# Altium PCB Teach MC interface.PcbDoc
Units mm, origin at the board's own origin, x right, y up, seen from the top; angles counter-clockwise.
Board outline 65 x 56 mm, 2 copper layers (Top Layer, Bottom Layer); 36 components, 37 nets, 175 pads, 420 vias.
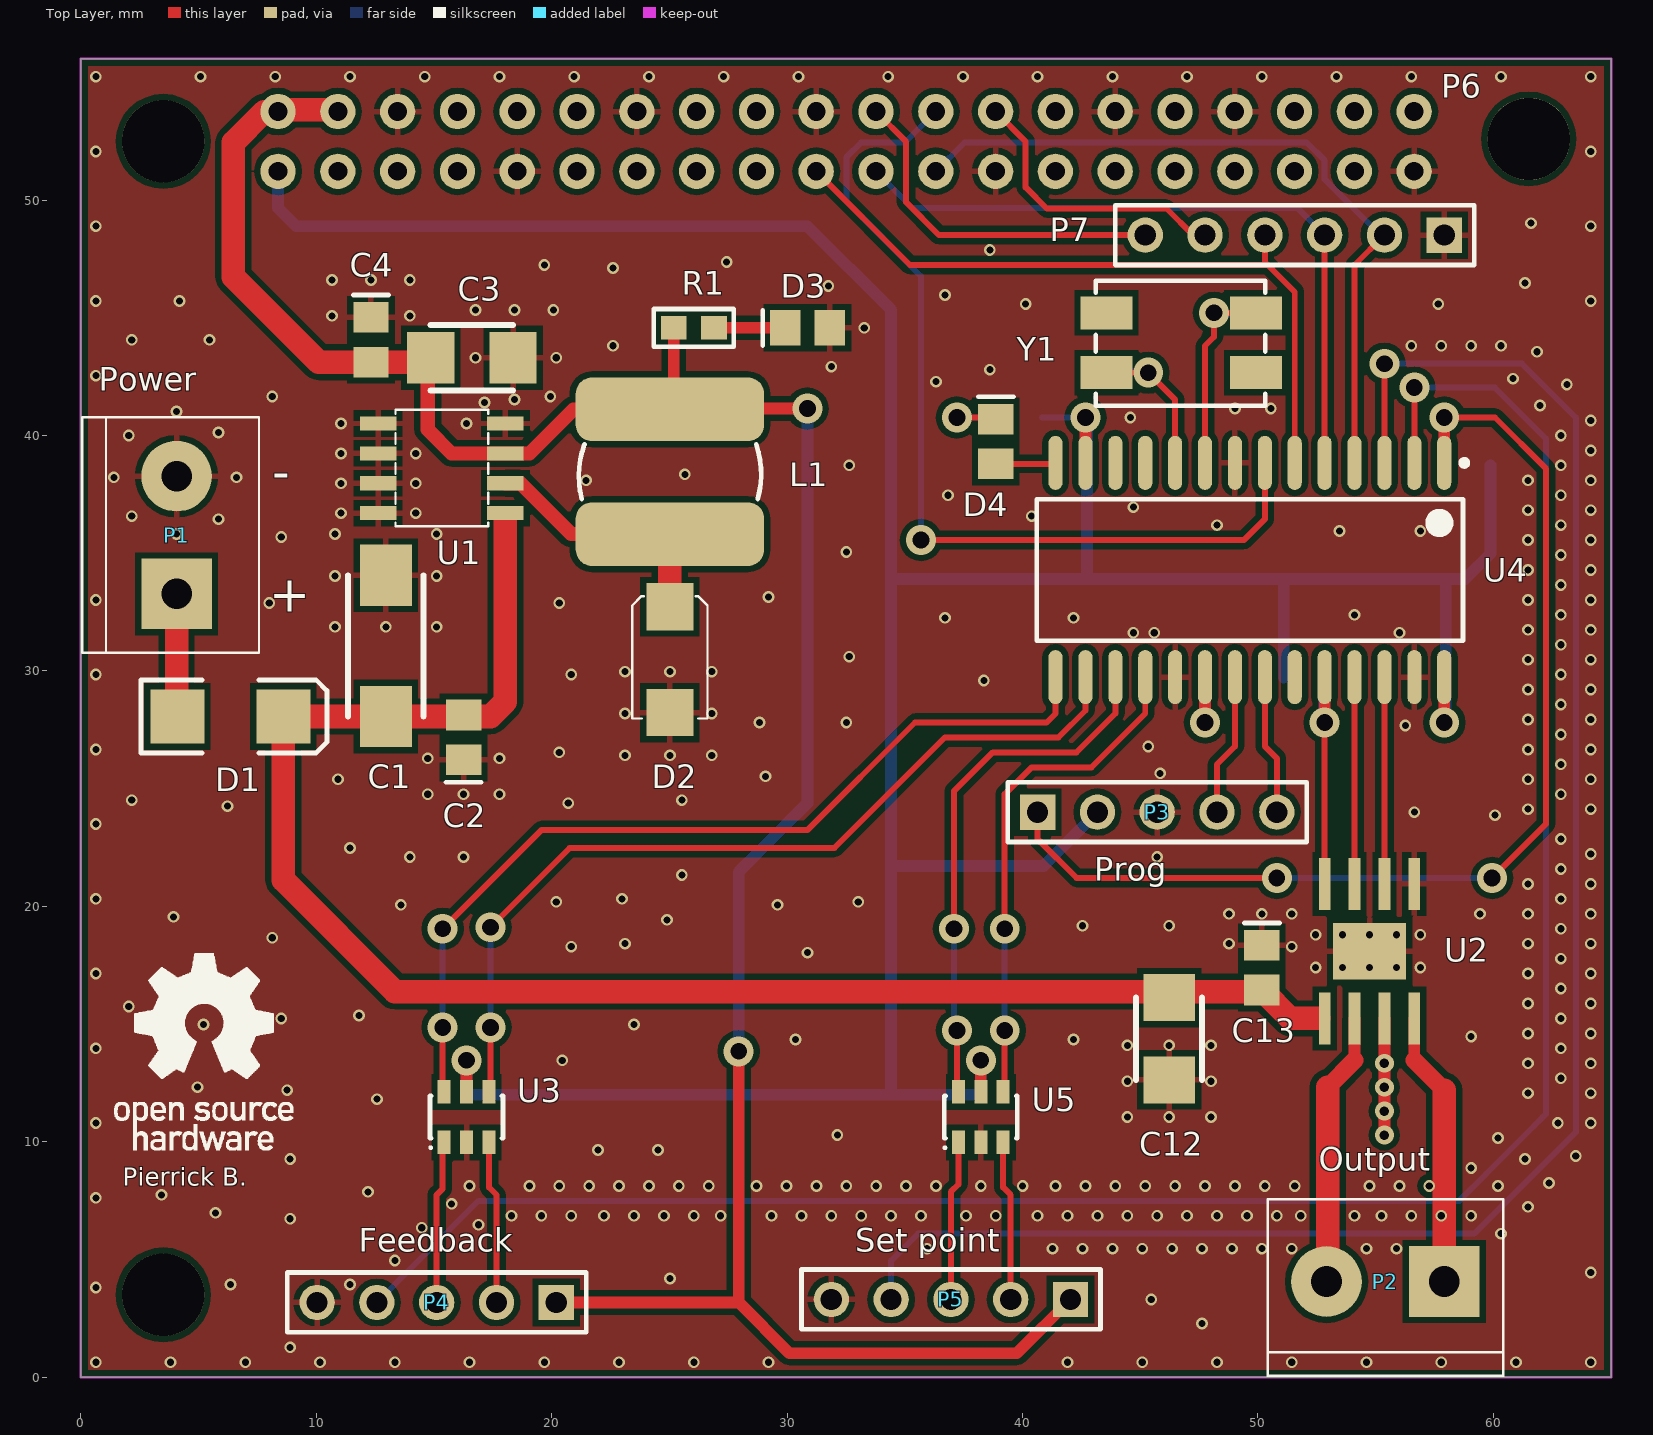
[diagram p0: Top Layer view]
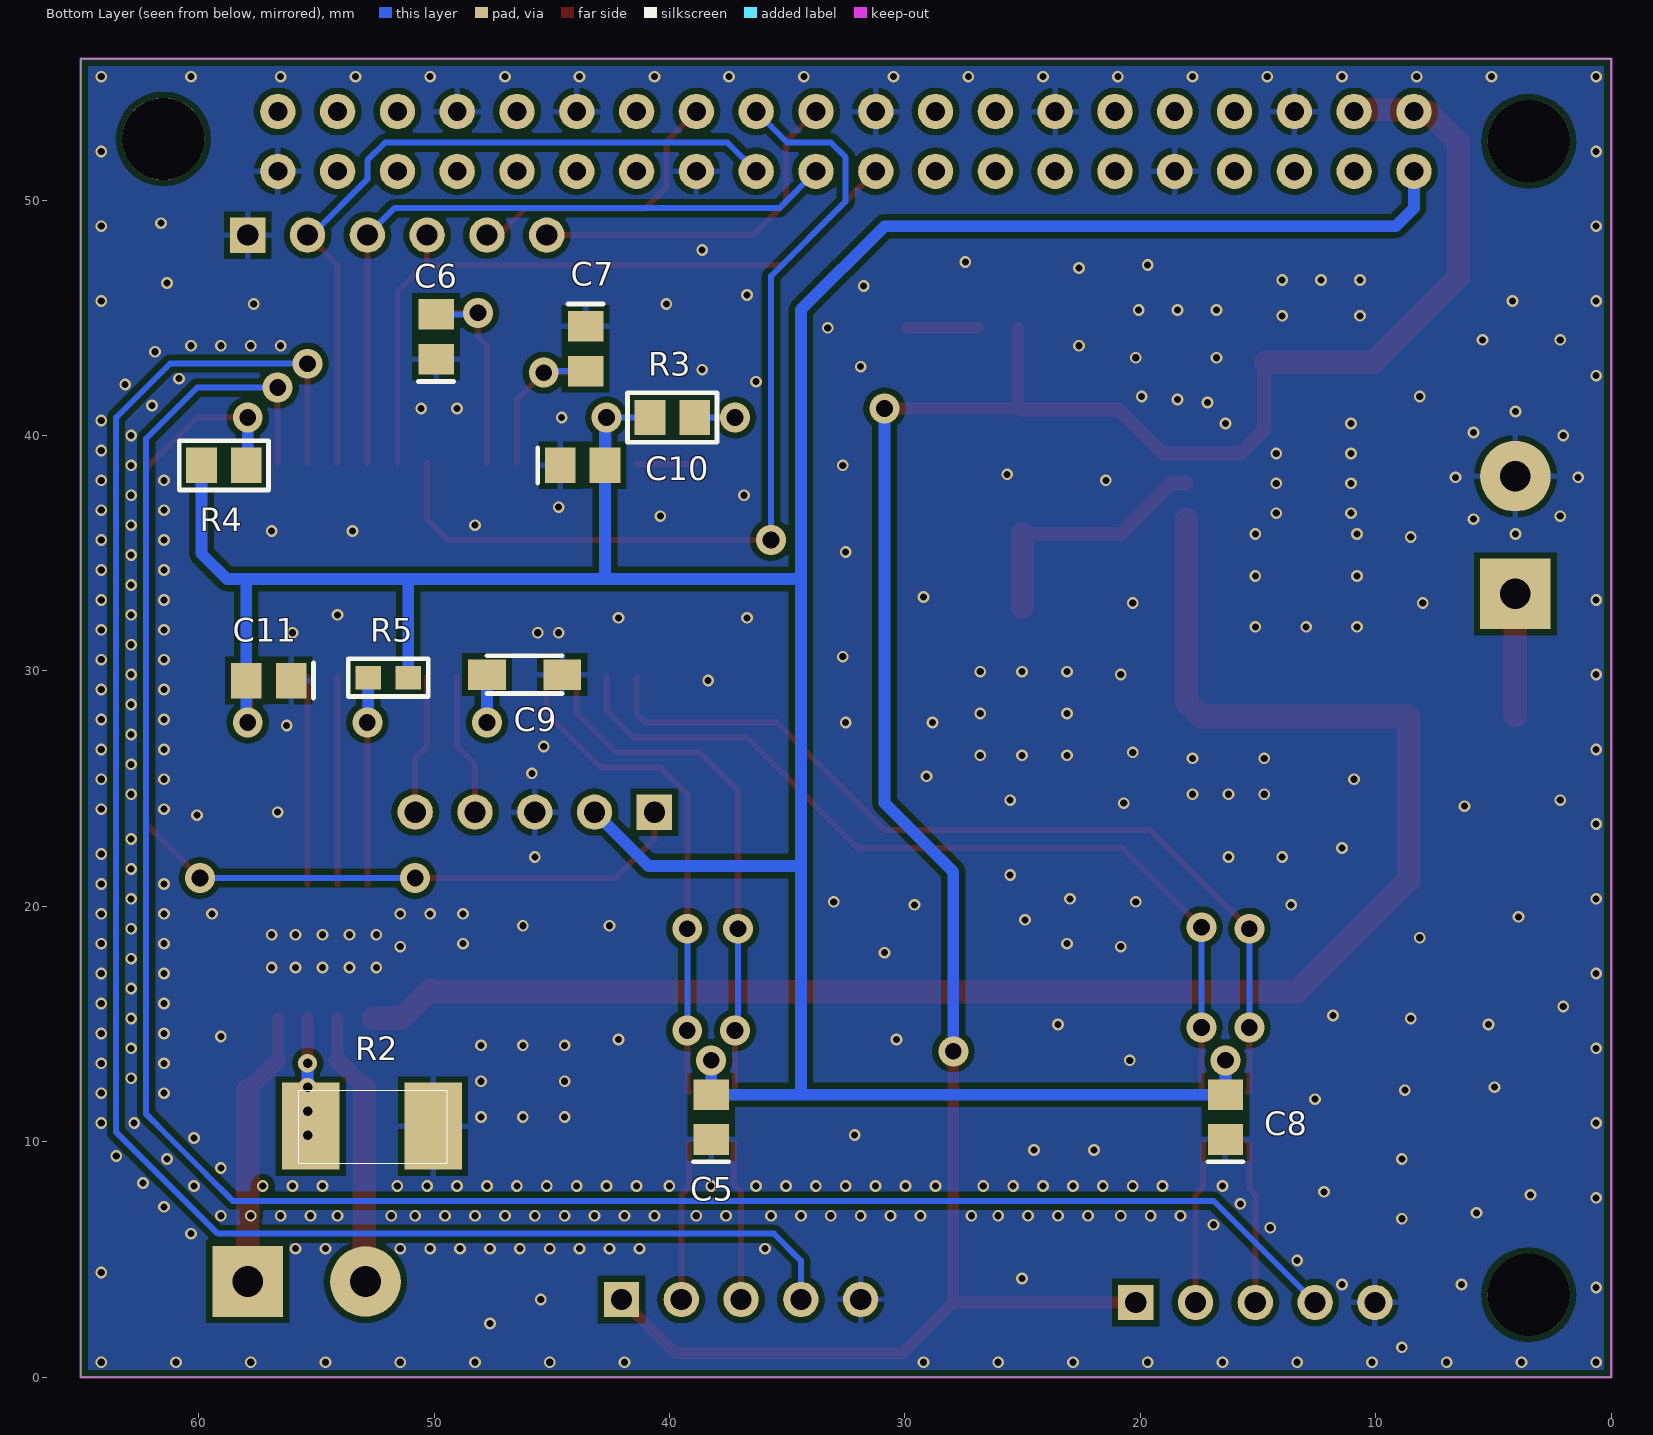
[diagram p1: Bottom Layer view, seen from below]
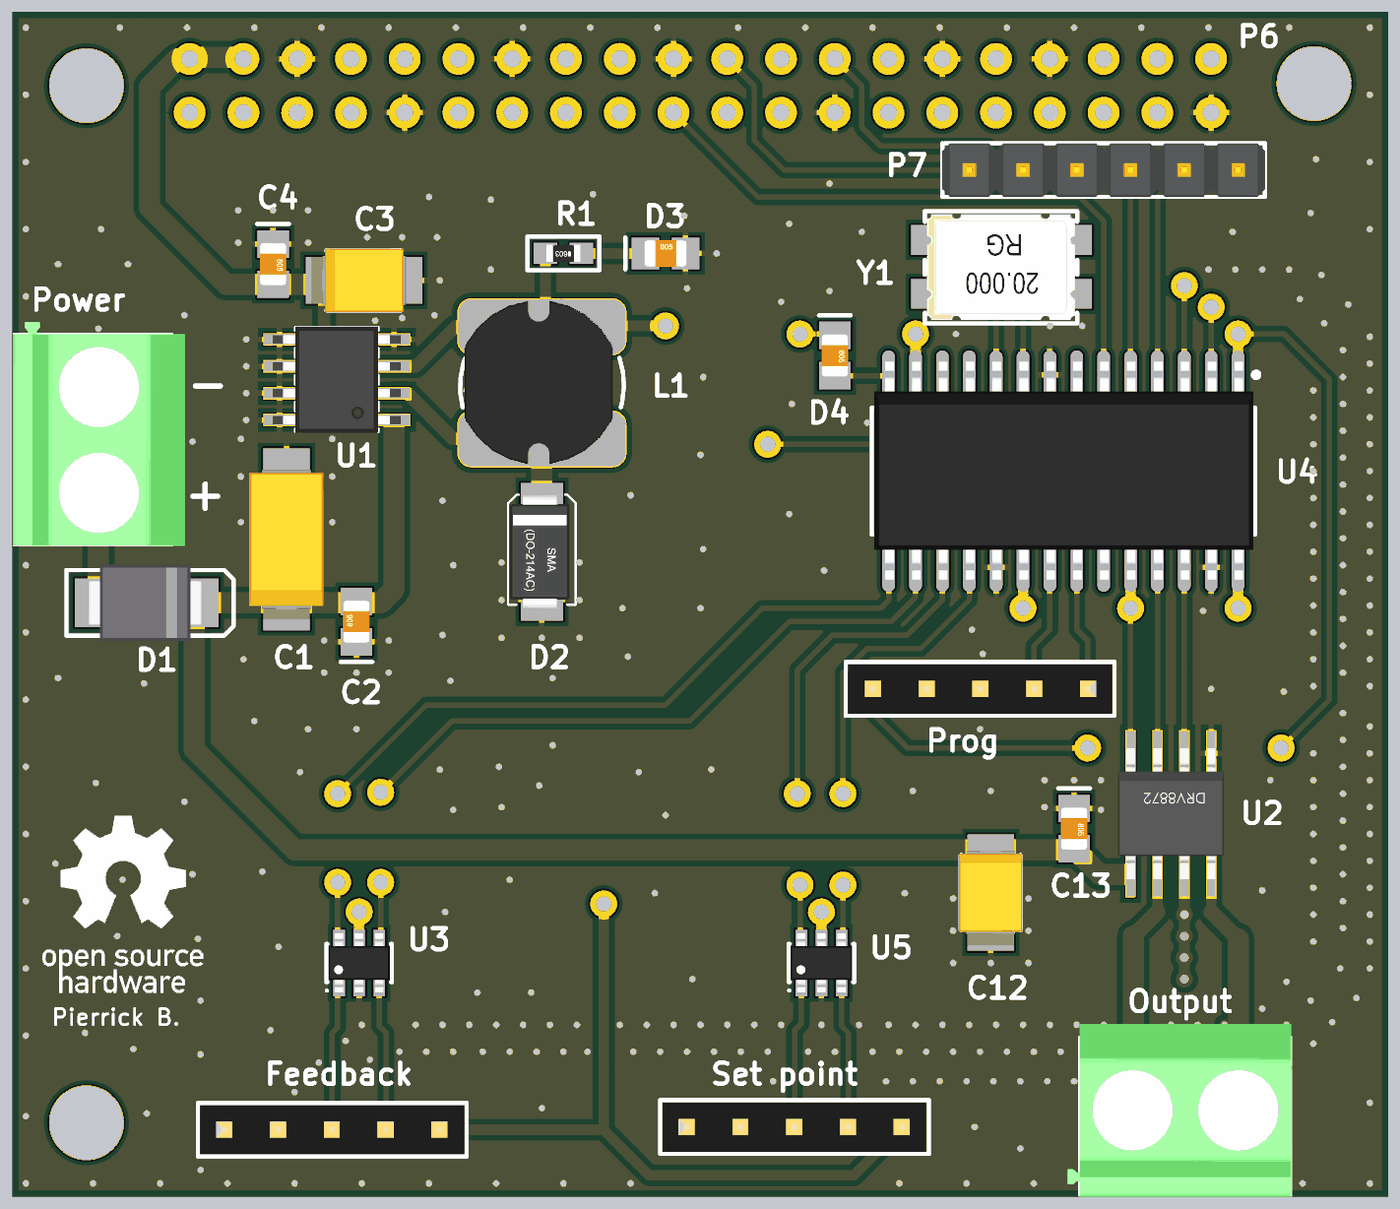
[diagram p2: 3D render of the assembled board from above, using the file's embedded part models]
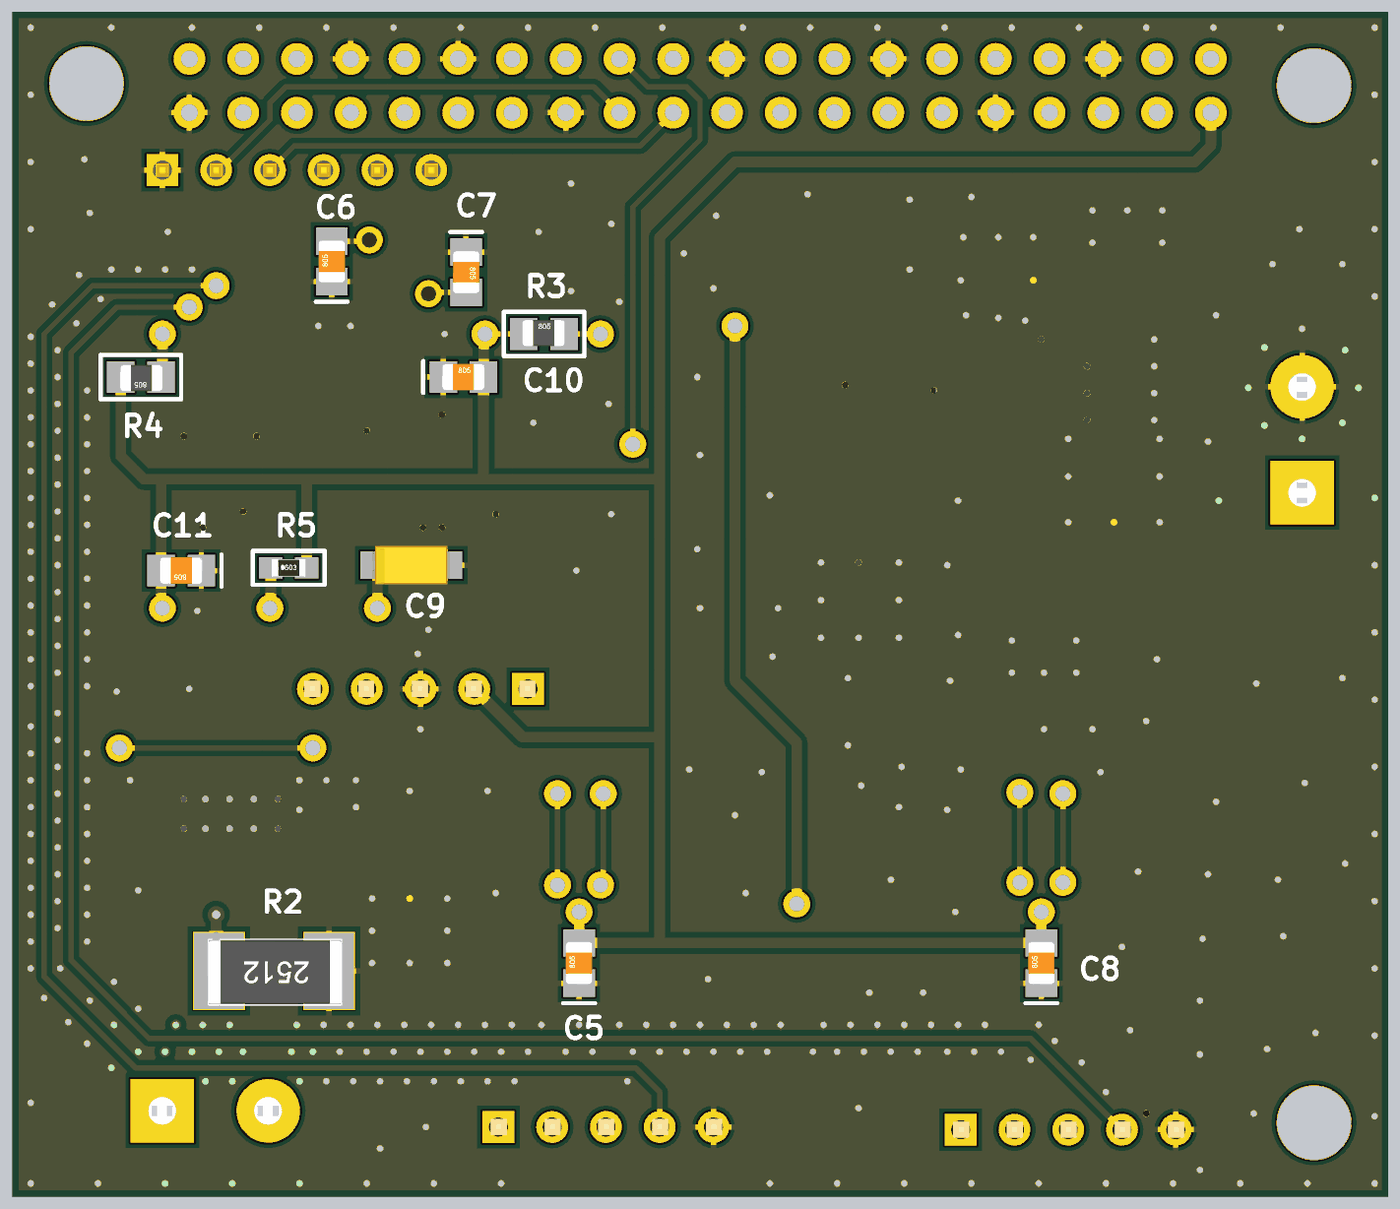
[diagram p3: 3D render of the assembled board from below, using the file's embedded part models]

## Layer stack, top to bottom
Top Layer: signal copper 0.0356
Dielectric: dielectric 0.32, FR-4, Dk 4.8
Bottom Layer: signal copper 0.0356

## Board outline
0,0 65,0 65,56 0,56

## Design rules (kind name [scope] priority, off if disabled: settings)
Clearance [All] p1: gap=0.254
HoleSize [All] p1: absolutevalues=TRUE maxlimit=3.5 minlimit=0.025 maxpercent=80.000 minpercent=20.000
PlaneConnect PlaneConnect_Via [All] p1: planeconnectstyle=Direct reliefexpansion=0.508 reliefentries=4 reliefconductorwidth=0.254 reliefairgap=0.254
PlaneConnect [All] p2: planeconnectstyle=NoConnect reliefexpansion=0.508 reliefentries=4 reliefconductorwidth=0.254 reliefairgap=0.254
PolygonConnect PolygonConnect_Via [IsVia vs InNet('GND')] p1: connectstyle=Direct reliefconductorwidth=0.254 reliefentries=4 polygonreliefangle="90 Angle"
PolygonConnect [All] p2: connectstyle=Relief reliefconductorwidth=0.254 reliefentries=4 polygonreliefangle="90 Angle"
RoutingVias [All] p1: holewidth=0.711 width=1.27 viastyle="Through Hole" minholewidth=0.711 minwidth=1.27 maxholewidth=0.711 maxwidth=1.27
SilkscreenOverComponentPads [All] p1: minsilkscreentomaskgap=0.254
SolderMaskExpansion [All] p1: expansion=0.102
Width [All] p1: maxlimit=1 minlimit=0.254 preferedwidth=0.5
25 further rules are at their usual default settings.

## Components (designator, comment, footprint, x,y, rotation, side; value= is the part's Value field where it differs from the comment)
C1 "Cap Pol" "Boitier tantale C" 12.954,28.067 r90 top
C2 "Cap" C0805 16.256,27.178 r90 top
C3 "Cap Pol" "Boitier tantale B" 14.859,43.307 r0 top
C4 "Cap" C0805 12.319,44.069 r270 top
C5 "Cap" C0805 38.227,11.049 r90 bottom
C6 "Cap" C0805 49.911,44.196 r90 bottom
C7 "Cap" C0805 43.561,43.688 r270 bottom
C8 "Cap" C0805 16.383,11.049 r90 bottom
C9 "Cap Pol" "Boitier tantale A" 47.752,29.845 r180 bottom
C10 "Cap" C0805 43.688,38.735 r180 bottom
C11 "Cap" C0805 57.023,29.591 r0 bottom
C12 "Cap Pol" "Boitier tantale B" 46.228,16.129 r270 top
C13 "Cap" C0805 50.165,17.399 r270 top
D1 "MBRS130L" SMB 6.35,28.067 r0 top
D2 "SS12." SMA 25.019,30.48 r90 top
D3 "LED1" C0805 30.861,44.577 r0 top
D4 "LED1" C0805 38.862,39.751 r270 top
L1 "Inductor" MCSDC0805 25.019,35.814 r180 top
P1 "Power" 20.501M/2 4.064,33.274 r90 top
P2 "Power" 20.501M/2 57.912,4.064 r180 top
P3 "ICSP" HDR1X5 40.64,24.003 r0 top
P4 "Feedback" HDR1X5 20.193,3.175 r180 top
P5 "Input" HDR1X5 42.037,3.302 r180 top
P6 "Header 40" "Raspberry Pi b+" 8.375,51.225 r0 top
P7 "Touch screen connector" HDR1X6 57.912,48.514 r180 top
R1 "Res2" 0603 26.035,44.577 r180 top
R2 "Res2" 2512 50.038,10.668 r0 bottom
R3 "Res2" 0805 39.878,40.767 r180 bottom
R4 "Res2" 0805 58.928,38.735 r0 bottom
R5 "Res2" 0603 51.943,29.718 r180 bottom
U1 "AP1509" SOP-8L 18.034,36.703 r90 top
U2 "DRV8872" DDA 56.642,20.955 r270 top
U3 "SN74LVC2G06" DBV-6 16.383,11.049 r0 top
U4 "DSPIC33FJ128MC802-I/SO" SOIC-SO28_N 49.657,34.29 r270 top
U5 "SN74LVC2G06" DBV-6 38.227,11.049 r0 top
Y1 "10MHz" DX-57 49.911,42.672 r180 top

## Footprints (in the part's own frame and the unit in brackets; to place one, negate y for a bottom-side part, rotate by r counter-clockwise, add the part's x,y. Pads: shape width x height; smd on the part's side, far side on the other; paste and mask are expansions set on the pad)
20.501M/2 [mm] "BORNIER POUR CI 2 VOIES"
  rect 3x3 hole 1.3: 1(0,0)
  round 3 hole 1.3: 2(5,0)
  silkscreen extent -2.5,-3.5 7.5,4, body extent -2.51,-4.1 8.06,4.05, height 10
0603 [mm]
  rect 1.1x1 smd: 1(-0.85,0) 2(0.85,0)
  silkscreen extent -1.7,-0.8 1.7,0.8, body extent -0.8,-0.41 0.8,0.41, height 0.45
0805 [mm] "Chip Capacitor; Body 2.0 x 1.2 mm (LxW typ)"
  rect 1.3x1.5 smd: 1(-0.95,0) 2(0.95,0)
  silkscreen extent -1.9,-1.05 1.9,1.05, body extent -1.02,-0.57 0.98,0.68, height 0.78
2512 [mm]
  rect 2.45x3.7 smd paste-0.05 mask+0.05: 1(0,0) 2(5.2,0)
  silkscreen extent -0.6,-1.5 5.7,1.6, body extent -0.62,-1.45 5.73,1.55, height 1.6
"Boitier tantale A" [mm]
  rect 1.6x1.3 smd: 1(0,0) 2(3.2,0)
  silkscreen extent 0,-0.8 3.2,0.8, body extent -0.8,-0.9 4,0.9, height 1.8
"Boitier tantale B" [mm]
  rect 2x2.2 smd: 1(0,0) 2(3.5,0)
  silkscreen extent 0,-1.4 3.5,1.4, body extent -0.74,-1.5 4.26,1.5, height 2.11
"Boitier tantale C" [mm]
  rect 2.6x2.2 smd: 1(0,0) 2(6,0)
  silkscreen extent 0,-1.6 6,1.6, body extent -0.8,-1.75 6.8,1.76, height 2.79
C0805 [mm] "Chip Capacitor; Body 2.0 x 1.2 mm (LxW typ)"
  rect 1.3x1.5 smd: 1(-0.95,0) 2(0.95,0)
  silkscreen extent -1.9,-0.75 -1.9,0.75, body extent -1,-0.62 1,0.63, height 0.78
DBV-6 [mm]
  rect 0.55x1 smd: 1(-0.95,-1.075) 2(0,-1.075) 3(0.95,-1.075) 4(0.95,1.075) 5(0,1.075) 6(-0.95,1.075)
  silkscreen extent -1.57,-1.35 1.55,0.9, body extent -1.45,-1.4 1.45,1.4, height 1.45
DDA [mm] "PowerPAD PLASTIC SMALL-OUTLINE"
  rect 2.2x0.5 smd paste-0.05 mask+0.05: 1(0,0) 2(0,-1.27) 3(0,-2.54) 4(0,-3.81) 5(5.715,-3.81) 6(5.715,-2.54) 7(5.715,-1.27) 8(5.715,0)
  rect 2.4x3.1 smd paste-0.05 mask+0.275: PPAD(2.86,-1.9)
  body extent -0.24,-4.4 5.96,0.6, height 1.53
DX-57 [mm]
  rect 2.2x1.4 smd: 0(0,0) 0(6.35,-2.54) 1(0,-2.54) 2(6.35,0)
  silkscreen extent -0.4,-3.9 6.8,1.4, body extent -0.3,-3.75 6.7,1.25, height 1.31
HDR1X5 [mm] "Connector; Header; 5 Position"
  rect 1.5x1.5 hole 0.9: 1(0,0)
  round 1.5 hole 0.9: 2(2.54,0) 3(5.08,0) 4(7.62,0) 5(10.16,0)
  silkscreen extent -1.27,-1.27 11.43,1.27, body extent -1.12,-1.17 11.32,1.17, height 10.79
HDR1X6 [mm] "Connector; Header; 6 Position"
  rect 1.5x1.5 hole 0.9: 1(0,0)
  round 1.5 hole 0.9: 2(2.54,0) 3(5.08,0) 4(7.62,0) 5(10.16,0)
  round 1.5 hole 0.9 paste-0.05 mask+0.05: 6(12.7,0)
  silkscreen extent -1.27,-1.27 13.97,1.27, body extent -1.27,-1.27 13.97,1.27, height 9.5
MCSDC0805 [mm] "MULTICOMP - SMD Power Inductors"
  rrect50% 8x2.7 smd paste-0.05 mask+0.05: 1(0,0) 2(0,-5.3)
  silkscreen extent -3.88,-3.82 3.87,-1.49, body extent -3.35,-6.53 3.65,1.2, height 5
"Raspberry Pi b+" [mm]
  round 1.5 hole 0.8: 1(0,0) 2(0,2.54) 3(2.54,0) 4(2.54,2.54) 5(5.08,0) 6(5.08,2.54) 7(7.62,0) 8(7.62,2.54) 9(10.16,0) 10(10.16,2.54) 11(12.7,0) 12(12.7,2.54) 13(15.24,0) 14(15.24,2.54) 15(17.78,0) 16(17.78,2.54) 17(20.32,0) 18(20.32,2.54) 19(22.86,0) 20(22.86,2.54) 21(25.4,0) 22(25.4,2.54) 23(27.94,0) 24(27.94,2.54) 25(30.48,0) 26(30.48,2.54) 27(33.02,0) 28(33.02,2.54) 29(35.56,0) 30(35.56,2.54) 31(38.1,0) 32(38.1,2.54) 33(40.64,0) 34(40.64,2.54) 35(43.18,0) 36(43.18,2.54) 37(45.72,0) 38(45.72,2.54) 39(48.26,0) 40(48.26,2.54)
SMA [mm] "SMA; 2 C-Bend Leads; Body 4.6 x 2.9 mm"
  rect 2x2 smd: 1(-2.25,0) 2(2.25,0)
  silkscreen extent -2.5,-1.6 2.7,1.6, body extent -2.75,-1.3 2.75,1.5, height 2.6
SMB [mm] "DO-214-AA/SMB; 2 C-Bend Leads; Body 5.3 x 3.6 mm, inc. leads (LxW)"
  rect 2.3x2.3 smd: 1(-2.25,0) 2(2.25,0)
  silkscreen extent -3.8,-1.55 4.1,1.55, body extent -2.77,-1.8 2.63,1.8, height 2.3
SOIC-SO28_N [mm] "SOIC, 28-Leads, Body 17.9x7.5mm, Pitch 1.27mm, IPC Medium Density"
  oval 2.3x0.6 smd: 1(-4.55,8.255) 2(-4.55,6.985) 3(-4.55,5.715) 4(-4.55,4.445) 5(-4.55,3.175) 6(-4.55,1.905) 7(-4.55,0.635) 8(-4.55,-0.635) 9(-4.55,-1.905) 10(-4.55,-3.175) 11(-4.55,-4.445) 12(-4.55,-5.715) 13(-4.55,-6.985) 14(-4.55,-8.255) 15(4.55,-8.255) 16(4.55,-6.985) 17(4.55,-5.715) 18(4.55,-4.445) 19(4.55,-3.175) 20(4.55,-1.905) 21(4.55,-0.635) 22(4.55,0.635) 23(4.55,1.905) 24(4.55,3.175) 25(4.55,4.445) 26(4.55,5.715) 27(4.55,6.985) 28(4.55,8.255)
  silkscreen extent -4.67,-9.05 3,9.23, body extent -5.18,-8.92 5.12,8.97, height 2.73
SOP-8L [mm]
  rect 0.6x1.55 smd paste-0.05 mask+0.05: 1(0,0) 2(1.27,0) 3(2.54,0) 4(3.81,0) 5(3.81,5.41) 6(2.54,5.41) 7(1.27,5.41) 8(0,5.41)
  silkscreen extent -0.56,0.74 4.39,4.67, body extent -0.6,-0.3 4.42,5.74, height 1.6

## Part data
C1 C3 C9 C12: "Polarized Capacitor"
C2 C4 C5 C6 C7 C8 C10 C11 C13: "Capacitor"
D1: library part Diode, "Default Diode"
D2: library part "Diode Schottky", "Diode Schottky"
D3 D4: "Typical RED GaAs LED"
P1 P2: library part "Header 2", "Header, 2-Pin"
P3 P4 P5: library part "Header 5", "Header, 5-Pin"
P7: library part "Header 6", "Header, 6-Pin"
R1 R2 R3 R4 R5: "Resistor"
U1: "24V Input, 1A/2A Output, High Efficiency 150KHz, 2A PWM BUCK DC/DC CONVERTER"
U2: "3.6A Brushed  DC Motor  Driver  With Fault Reporting"
U4: "High-Performance 16-bit Digital Signal Controller, 128 KB Flash, 16 KB RAM, 28-Pin SOIC, Industrial Temperature"
Y1: library part XTAL, "Crystal Oscillator"

## Free pads (board coordinates)
  round 3.5 hole 3.5: 0(3.5,3.5) 0(3.5,52.5) 0(61.5,52.6)

## Via types
v1: diameter 0.5, hole 0.3, Top Layer to Bottom Layer, tented both sides, 391 vias
v2: diameter 1.27, hole 0.711, Top Layer to Bottom Layer, 25 vias
v3: diameter 0.8, hole 0.4, Top Layer to Bottom Layer, tented both sides, 4 vias

## Nets (pads, with @x,y where several pads share a name; then routed paths per layer and width w, separated by ;. In a path a pad name is that pad's centre, name@x,y a point inside that pad or via, vN(x,y) a via of type N, cw(c..) or ccw(c..) an arc to the next point about the centre after c; other vN are vias at no path point)
3V3: C5.2 C8.2 C10.2 C11.2 P3.2 P6.1 R3.1 R4.2 R5.2 U3.5 U4.13 U4.28 U5.5 | length 152.5
  Top Layer w0.5: U3.5 v2(16.383,13.462) ; U5.5 v2(38.227,13.462) ; U4.13 v2(42.672,40.767) ; v2(57.912,27.813) U4.28
  Bottom Layer w0.254: C8.2@16.383,12.126 C8.2@16.449,12.192 ; R3.1 v2(42.672,40.767) v2@42.738,40.701 ; 42.738,33.97 42.799,33.909 ; 43.561,33.909 43.6,33.87 ; 51.054,33.909 51.093,33.87 ; v2(57.912,27.813) v2@57.973,27.874 ; 57.973,33.843 58.039,33.909
  Bottom Layer w0.5: P6.1 8.375,49.664 9.144,48.895 30.861,48.895 34.417,45.339 34.417,33.909 ; C8.2 34.417,11.999 ; C8.2@16.383,12.126 v2(16.383,13.462) ; v2(38.227,13.462) C5.2 34.417,11.999 ; C10.2 v2@42.738,40.701 ; P3.2 40.894,21.717 34.417,21.717 ; R5.2 51.093,33.87 ; v2@57.973,27.874 C11.2 57.973,33.843 ; R4.2 59.878,34.986 58.801,33.909 58.039,33.909 51.054,33.909 43.561,33.909 42.799,33.909 34.417,33.909 ; 34.417,11.999 34.417,21.717 ; 34.417,21.717 34.417,33.909
  Bottom Layer w0.52: 42.738,33.97 C10.2
+5V: C3.1 C4.2 L1.2 P4.1 P5.1 P6.2 P6.4 R1.2 U1.3 | length 106.8
  Top Layer w0.254: P6.4@10.832,53.848 P6.4 ; C3.1@14.671,43.119 14.732,43.18 C3.1 ; L1.2 25.053,41.148 L1.2@25.185,41.28
  Top Layer w0.5: P4.1 27.94,3.175 ; L1.2@25.053,41.148 v2(30.861,41.148) ; L1.2@25.185,41.28 R1.2 ; v2@27.94,13.97 v2(27.94,13.843) 27.94,3.175 ; P5.1 39.751,1.016 30.099,1.016 27.94,3.175
  Top Layer w0.6: C3.1@14.732,43.18 14.732,40.259 15.748,39.243 U1.3 19.05,39.243 20.921,41.114 L1.2
  Top Layer w1: P6.4@10.832,53.848 8.458,53.848 P6.2 7.791,53.765 6.477,52.451 6.477,46.736 10.094,43.119 C4.2 C3.1@14.671,43.119
  Bottom Layer w0.5: 27.94,14.478 27.94,21.463 30.861,24.384 v2(30.861,41.148)
+12V: C1.1 C2.2 C12.1 C13.2 D1.2 U1.1 U2.5 | length 70.7
  Top Layer w0.254: C2.2@16.195,28.067 C2.2
  Top Layer w1: U1.1@18.034,36.449 18.034,28.702 17.399,28.067 16.195,28.067 C1.1 D1.2 8.6,21.118 13.335,16.383 C13.2@49.911,16.383 ; C13.2 51.374,15.24 52.578,15.24
CLK: P6.23 P7.2 U4.4 | length 31.9
  Top Layer w0.254: U4.4 54.102,47.244 P7.2
  Bottom Layer w0.254: P6.23 37.541,52.451 52.07,52.451 52.832,51.689 52.832,50.889 55.207,48.514 P7.2
CS_INTERFACE: P6.24 U4.7 | length 40.1
  Top Layer w0.254: v2(35.687,35.56) 49.403,35.56 50.292,36.449 U4.7
  Bottom Layer w0.254: v2@35.687,35.052 35.687,46.773 32.512,49.948 32.512,51.816 33.147,52.451 35.001,52.451 P6.24
CS_TOUCH: P6.26 P7.5 | length 12.2
  Top Layer w0.254: P6.26 40.132,52.488 40.132,50.546 41.033,49.645 46.113,49.645 47.244,48.514 P7.5
E1_ANA: P4.4 U4.2 | length 91.4
  Top Layer w0.254: U4.2 v2(56.642,42.037)
  Bottom Layer w0.254: P4.4 16.891,7.493 58.55,7.493 59.686,8.629 ; v2(56.642,42.037) 60.071,42.037 62.23,39.878 62.23,11.176 62.099,11.045 62.096,11.045 61.726,10.675 61.726,10.672 59.686,8.632
E1_PHASEA: U3.4 U4.16 | length 37.6
  Top Layer w0.254: U3.4 17.399,12.19 v2(17.399,14.859) ; v2@17.333,19.05 20.762,22.479 32.004,22.479 36.703,27.178 41.529,27.178 42.672,28.321 U4.16
  Bottom Layer w0.254: v2(17.399,14.859) v2(17.399,19.116)
E1_PHASEB: U3.6 U4.15 | length 38.3
  Top Layer w0.254: v2(15.367,14.859) 15.367,12.19 U3.6 ; v2(15.367,19.05) 19.558,23.241 30.861,23.241 35.433,27.813 41.021,27.813 41.402,28.194 U4.15
  Bottom Layer w0.254: v2(15.367,14.859) v2(15.367,19.05)
E2_ANA: P5.4 U4.3 | length 76.6
  Top Layer w0.254: U4.3 v2(55.372,43.053)
  Bottom Layer w0.254: P5.4 34.417,4.953 35.56,6.096 59.185,6.096 63.5,10.411 63.5,40.767 61.214,43.053 v2(55.372,43.053)
E2_PHASEA: U4.18 U5.4 | length 21.9
  Top Layer w0.254: U5.4 39.243,12.19 v2(39.243,14.732) v2@39.243,14.986 ; v2(39.243,19.05) 39.243,24.765 40.386,25.908 42.926,25.908 45.212,28.194 U4.18
  Bottom Layer w0.254: v2(39.243,14.732) v2(39.243,19.05)
E2_PHASEB: U4.17 U5.6 | length 23
  Top Layer w0.254: v2(37.084,19.05) 37.084,24.892 38.735,26.543 42.291,26.543 43.942,28.194 U4.17 ; v2(37.211,14.732) 37.211,12.19 U5.6
  Bottom Layer w0.254: v2@37.084,19.431 v2(37.084,19.05) 37.084,14.859 v2(37.211,14.732)
F\A\U\L\T\: R5.1 U2.4 U4.24 | length 10.7
  Top Layer w0.254: U2.4 v2(52.832,27.813)
  Top Layer w0.5: v2(52.832,27.813) U4.24
  Bottom Layer w0.254: v2@52.793,27.852 v2(52.832,27.813)
  Bottom Layer w0.5: v2@52.793,27.852 R5.1
GND: C1.2 C2.1 C3.2 C4.1 C5.1 C6.1 C7.1 C8.1 C9.2 C10.1 C11.1 C12.2 C13.1 D2.1 D3.2 P1.2 P3.3 P4.5 P5.5 P6.6 P6.9 P6.14 P6.20 P6.25 P6.30 P6.34 P6.39 P7.1 R2.1 U1.4 U1.5 U1.6 U1.7 U1.8 U2.1 U2.PPAD U3.2 U4.8 U4.19 U4.27 U5.2
  other v1: 0.635,0.635 3.81,0.635 6.985,0.635 10.16,0.635 13.335,0.635 16.51,0.635 19.685,0.635 22.86,0.635 26.035,0.635 29.21,0.635 41.91,0.635 45.085,0.635 48.26,0.635 51.435,0.635 54.61,0.635 57.785,0.635 60.96,0.635 64.135,0.635 8.89,1.27 47.625,2.286 45.466,3.302 0.635,3.81 6.35,3.937 11.43,3.937 25.019,4.191 64.135,4.445 13.335,4.953 35.941,5.461 41.275,5.461 42.545,5.461 43.815,5.461 45.085,5.461 46.355,5.461 47.625,5.461 48.895,5.461 50.165,5.461 51.435,5.461 54.61,5.461 55.88,5.461 60.325,6.096 14.478,6.35 16.891,6.477 8.89,6.731 18.288,6.858 19.558,6.858 20.828,6.858 22.225,6.858 23.495,6.858 24.765,6.858 26.035,6.858 27.178,6.858 29.337,6.858 30.607,6.858 31.877,6.858 33.147,6.858 34.417,6.858 35.687,6.858 37.592,6.858 38.862,6.858 40.64,6.858 41.91,6.858 43.18,6.858 44.45,6.858 45.72,6.858 46.99,6.858 48.26,6.858 49.53,6.858 50.8,6.858 51.816,6.858 54.102,6.858 55.245,6.858 56.515,6.858 59.055,6.858 5.715,6.985 61.468,7.239 15.748,7.366 0.635,7.62 3.429,7.747 12.192,7.874 16.51,8.128 19.05,8.128 20.32,8.128 21.59,8.128 22.86,8.128 24.13,8.128 25.4,8.128 26.67,8.128 28.702,8.128 29.972,8.128 31.242,8.128 32.512,8.128 33.782,8.128 35.052,8.128 36.322,8.128 38.227,8.128 40.005,8.128 41.402,8.128 42.672,8.128 43.942,8.128 45.212,8.128 46.482,8.128 47.752,8.128 49.022,8.128 50.292,8.128 51.562,8.128 54.737,8.128 56.007,8.128 60.198,8.128 62.357,8.255 59.055,8.89 8.89,9.271 61.341,9.271 63.5,9.398 21.971,9.652 24.511,9.652 60.198,10.16 32.131,10.287 0.635,10.795 62.738,10.795 64.135,10.795 44.45,11.049 46.228,11.049 48.006,11.049 12.573,11.811 61.468,12.065 64.135,12.065 8.763,12.192 4.953,12.319 44.45,12.573 48.006,12.573 62.865,12.7 61.468,13.335 64.135,13.335 20.447,13.462 0.635,13.97 62.865,13.97 44.45,14.097 46.228,14.097 48.006,14.097 30.353,14.351 42.164,14.351 59.055,14.478 61.468,14.605 64.135,14.605 5.207,14.986 23.495,14.986 8.509,15.24 62.865,15.24 11.811,15.367 2.032,15.748 61.468,15.875 64.135,15.875 62.865,16.51 0.635,17.145 61.468,17.145 64.135,17.145 52.451,17.399 53.594,17.399 54.737,17.399 55.88,17.399 56.896,17.399 62.865,17.78 30.861,18.034 20.828,18.288 51.435,18.288 23.114,18.415 48.768,18.415 61.468,18.415 64.135,18.415 8.128,18.669 52.451,18.796 53.594,18.796 54.737,18.796 55.88,18.796 56.896,18.796 62.865,19.05 42.545,19.177 46.228,19.177 24.892,19.431 3.937,19.558 48.768,19.685 50.165,19.685 51.435,19.685 59.436,19.685 61.468,19.685 64.135,19.685 13.589,20.066 29.591,20.066 20.193,20.193 33.02,20.193 0.635,20.32 22.987,20.32 62.865,20.32 61.468,20.955 64.135,20.955 25.527,21.336 62.865,21.59 13.97,22.098 16.256,22.098 45.72,22.098 64.135,22.225 11.43,22.479 62.865,22.86 0.635,23.495 60.071,23.876 56.642,24.003 61.468,24.13 64.135,24.13 6.223,24.257 20.701,24.384 2.159,24.511 25.527,24.511 14.732,24.765 16.256,24.765 17.78,24.765 62.865,24.765 10.922,25.4 61.468,25.4 64.135,25.4 29.083,25.527 45.847,25.654 62.865,26.035 14.732,26.289 17.78,26.289 23.114,26.416 25.019,26.416 26.797,26.416 20.32,26.543 0.635,26.67 61.468,26.67 64.135,26.67 45.339,26.797 62.865,27.305 56.261,27.686 28.829,27.813 32.512,27.813 61.468,27.94 64.135,27.94 23.114,28.194 26.797,28.194 62.865,28.575 61.468,29.21 64.135,29.21 38.354,29.591 0.635,29.845 20.828,29.845 62.865,29.845 23.114,29.972 25.019,29.972 26.797,29.972 61.468,30.48 64.135,30.48 32.639,30.607 62.865,31.115 44.704,31.623 45.593,31.623 56.007,31.623 61.468,31.75 64.135,31.75 10.795,31.877 12.954,31.877 15.113,31.877 36.703,32.258 42.164,32.258 54.102,32.385 62.865,32.385 8.001,32.893 20.32,32.893 0.635,33.02 61.468,33.02 64.135,33.02 29.21,33.147 62.865,33.655 10.795,34.036 15.113,34.036 61.468,34.29 64.135,34.29 62.865,34.925 32.512,35.052 61.468,35.56 64.135,35.56 8.509,35.687 4.064,35.814 10.795,35.814 15.113,35.814 53.467,35.941 56.896,35.941 48.26,36.195 62.865,36.195 5.842,36.449 2.159,36.576 40.386,36.576 11.049,36.703 14.224,36.703 61.468,36.83 64.135,36.83 44.704,36.957 36.83,37.465 62.865,37.465 11.049,37.973 14.224,37.973 21.463,38.1 61.468,38.1 64.135,38.1 1.397,38.227 6.604,38.227 25.654,38.354 32.639,38.735 62.865,38.735 11.049,39.243 14.224,39.243 64.135,39.37 2.032,40.005 62.865,40.005 5.842,40.132 11.049,40.513 16.383,40.513 64.135,40.64 44.577,40.767 4.064,41.021 49.022,41.148 50.546,41.148 61.976,41.275 17.145,41.402 18.415,41.529 8.128,41.656 19.939,41.656 63.119,42.164 36.322,42.291 60.833,42.418 0.635,42.545 38.608,42.799 31.877,42.926 16.764,43.307 20.193,43.307 61.849,43.561 22.606,43.815 56.515,43.815 57.785,43.815 59.055,43.815 60.325,43.815 2.159,44.069 5.461,44.069 33.274,44.577 10.668,45.085 13.97,45.085 16.764,45.339 18.415,45.339 20.066,45.339 40.132,45.593 57.658,45.593 0.635,45.72 4.191,45.72 64.135,45.72 36.703,45.974 31.75,46.355 61.341,46.482 10.668,46.609 12.319,46.609 13.97,46.609 22.606,47.117 19.685,47.244 27.432,47.371 38.608,47.879 0.635,48.895 64.135,48.895 61.595,49.022 0.635,52.07 64.135,52.07 0.635,55.245 5.08,55.245 8.255,55.245 11.43,55.245 14.605,55.245 17.78,55.245 20.955,55.245 24.13,55.245 27.305,55.245 30.48,55.245 34.29,55.245 37.465,55.245 40.64,55.245 43.815,55.245 46.99,55.245 50.165,55.245 53.34,55.245 56.515,55.245 60.325,55.245 64.135,55.245
IN1: U2.3 U4.25 | length 8.8
  Top Layer w0.254: U2.3 U4.25
IN2: U2.2 U4.26 | length 8.8
  Top Layer w0.254: U2.2 U4.26
IRQ: P6.22 P7.6 | length 15.1
  Top Layer w0.254: P6.22 35.052,52.488 35.052,49.911 36.449,48.514 P7.6
M\C\L\R\: P3.1 R4.1 U4.1 | length 48.7
  Top Layer w0.254: P3.1 40.64,22.86 42.291,21.209 v2(50.8,21.209) ; v2(57.912,40.767) 60.071,40.767 62.23,38.608 62.23,23.495 v2(59.944,21.209)
  Top Layer w0.5: U4.1 v2(57.912,40.767)
  Bottom Layer w0.254: v2(50.8,21.209) v2(59.944,21.209) ; R4.1@57.912,38.801 R4.1
  Bottom Layer w0.5: R4.1@57.912,38.801 v2(57.912,40.767)
MISO: P6.21 P7.3 U4.5 | length 29.9
  Top Layer w0.254: U4.5 P7.3
  Bottom Layer w0.254: P6.21 35.343,49.657 51.689,49.657 P7.3
MOSI: P6.19 P7.4 U4.6 | length 31
  Top Layer w0.254: P6.19 35.216,47.244 50.419,47.244 ; P7.4 50.292,47.371 50.419,47.244 ; U4.6 51.562,46.101 50.419,47.244
NetC6_2: C6.2 U4.9 Y1.1 | length 10.1
  Top Layer w0.254: U4.9 47.752,43.815 48.133,44.196 v2(48.133,45.212) Y1.1
  Bottom Layer w0.254: v2(48.133,45.212) 48.199,45.146 C6.2
NetC7_2: C7.2 U4.10 Y1.2 | length 7.9
  Top Layer w0.254: Y1.2 v2(45.339,42.672) 46.482,41.529 U4.10
  Bottom Layer w0.254: C7.2 45.273,42.738 v2(45.339,42.672)
NetC9_1: C9.1 U4.20 | length 3.7
  Top Layer w0.5: v2@47.752,28.067 U4.20
  Bottom Layer w0.5: v2(47.752,27.813) C9.1
NetD1_1: D1.1 P1.1 | length 5.2
  Top Layer w0.254: D1.1@4.064,28.103 D1.1
  Top Layer w1: D1.1@4.064,28.103 P1.1
NetD2_2: D2.2 L1.1 U1.2 | length 11
  Top Layer w0.6: U1.2 18.669,37.973 20.828,35.814 L1.1
  Top Layer w1: D2.2 L1.1
NetD3_1: D3.1 R1.1 | length 3
  Top Layer w0.5: R1.1 D3.1
NetD4_1: D4.1 R3.2 | length 3.4
  Top Layer w0.254: v2(37.211,40.767) 38.796,40.767 D4.1
  Bottom Layer w0.254: v2(37.211,40.767) R3.2
NetD4_2: D4.2 U4.14 | length 2.6
  Top Layer w0.254: D4.2 41.363,38.801 U4.14
NetP2_1: P2.1 U2.8 | length 11.9
  Top Layer w0.5: 56.642,13.462 U2.8
  Top Layer w0.75: 56.642,13.462 57.912,12.192
  Top Layer w1: P2.1@57.404,4.064 57.912,4.572 57.912,12.192
  other v1: 57.785,6.858 57.277,8.128
NetP2_2: P2.2 U2.6 | length 11.1
  Top Layer w0.5: 54.102,13.462 U2.6
  Top Layer w0.75: 52.959,12.319 54.102,13.462
  Top Layer w1: P2.2@52.959,4.619 52.959,12.319
NetP4_2: P4.2 U3.3 | length 6.9
  Top Layer w0.254: U3.3 17.333,8.067 17.653,7.747 P4.2
NetP4_3: P4.3 U3.1 | length 6.9
  Top Layer w0.254: P4.3 15.113,7.747 15.367,8.001 15.367,9.908 U3.1
NetP5_2: P5.2 U5.3 | length 6.8
  Top Layer w0.254: U5.3 39.177,8.067 39.497,7.747 P5.2
NetP5_3: P5.3 U5.1 | length 6.9
  Top Layer w0.254: P5.3 36.957,7.874 37.277,8.194 U5.1 U5.1@37.211,9.908
NetR2_2: R2.2 U2.7 | length 6.1
  Top Layer w0.5: v3(55.372,10.287) v3(55.372,11.303) v3(55.372,12.319) v3(55.372,13.335) U2.7
  Bottom Layer w0.5: R2.2@55.372,12.192 v3(55.372,13.335)
PGC: P3.5 U4.22 | length 5.9
  Top Layer w0.254: U4.22 50.292,26.797 50.8,26.289 P3.5
PGD: P3.4 U4.21 | length 6.1
  Top Layer w0.254: P3.4 48.26,26.035 49.022,26.797 U4.21
pads on no net: P6.3 P6.5 P6.7 P6.8 P6.10 P6.11 P6.12 P6.13 P6.15 P6.16 P6.17 P6.18 P6.27 P6.28 P6.29 P6.31 P6.32 P6.33 P6.35 P6.36 P6.37 P6.38 P6.40 U4.11 U4.12 U4.23 Y1.0

## Polygon pours and split planes (outlines as drawn)
GND on Top Layer "Top GND" (solid, remove dead copper, pour order 2): 0.051,55.988 65.051,55.988 65.051,-0.012 0.051,-0.012
GND on Bottom Layer "Bot GND" (solid, remove dead copper, pour order 4): 0,56.007 65,56.007 65,0.007 0,0.007

## Keep-outs
Keep-Out Layer:
  the board outline again, w0.1

## Silkscreen, mask and mechanical layers (free items; w line width, h text height)
Top Overlay:
  drawing of 18 lines, arcs and shapes, not listed
  text "Power" at 0.762,41.91 h1
  text "-" at 8.128,37.719 h1.52
  text "+" at 8.001,32.512 h1.52
  text "Prog" at 43.053,21.082 h1
  text "Output" at 52.578,8.763 h1
  text "Pierrick B." at 1.778,8.128 h0.76
  text "Feedback" at 11.811,5.334 h1
  text "Set point" at 32.893,5.334 h1